# EAGLE board Safety Valve (EAGLE 9.1.3)
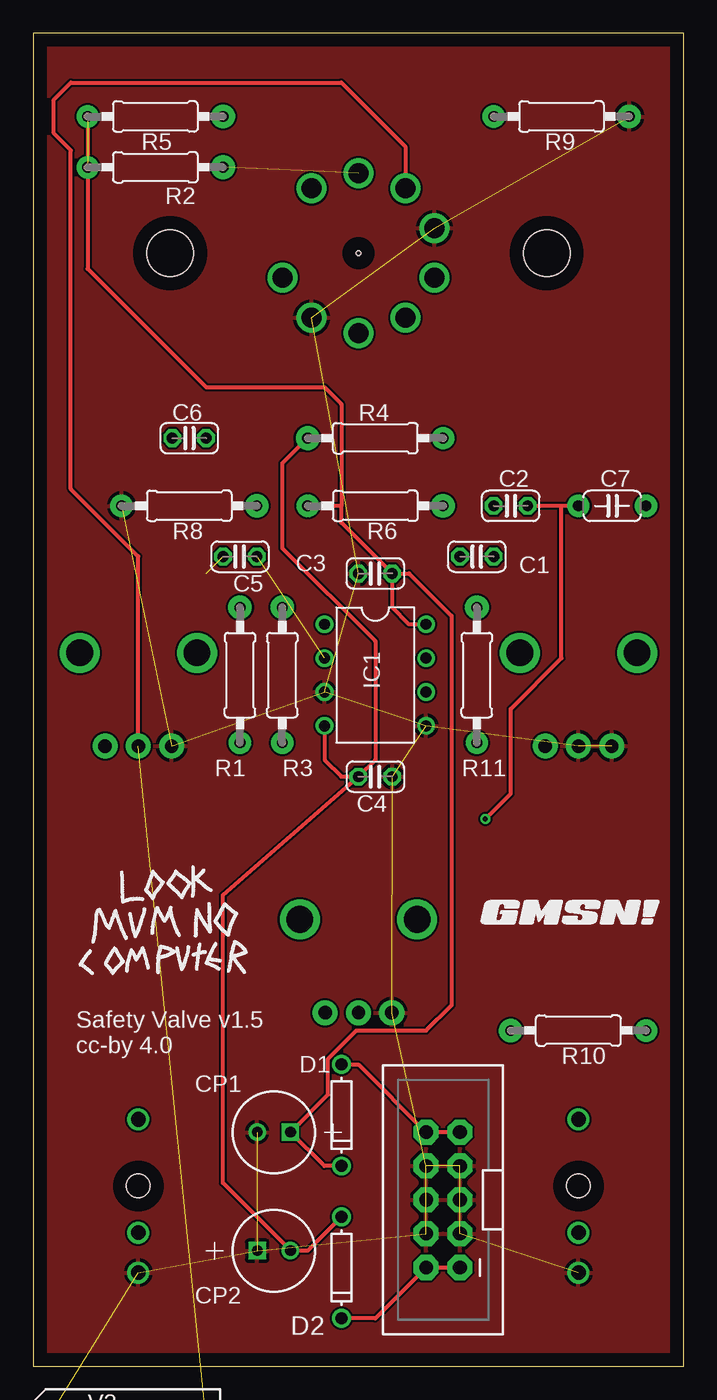
[diagram p0: board, top side]
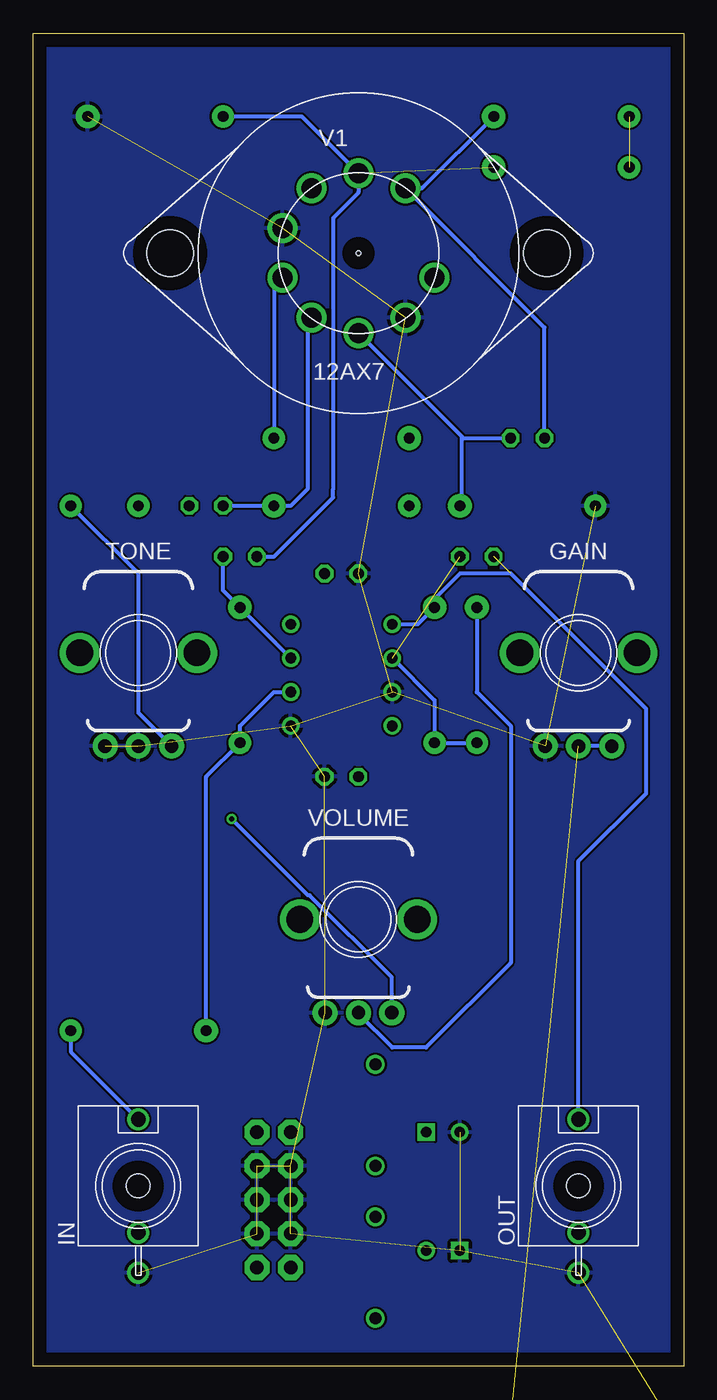
[diagram p1: board, bottom side, seen from below]

Size 48.8 x 100 mm. Coordinates in mm from the lower left corner, seen from the top.
Outline: 0,0 48.8,0 48.8,100 0,100 0,0
Copper layers (1*16): Top 0.035mm / dielectric 1.5mm / Bottom 0.035mm
Design rules "default": minimum track width 6mil, minimum drill 0.35mm, track to track 6mil, track to pad 6mil, pad to pad 6mil, via to via 6mil, smd to smd 6mil, copper to edge 40mil, drill to drill 6mil, minimum pad ring 10mil, minimum via ring 8mil, stop-mask expansion 4mil, vias tented up to drill 0mil, thermal gap 10mil

## Footprints (pad centres in the part's own frame; a part is rotated, then mirrored left to right if it is on the bottom)
C025-024X044 = drill 0.813 octagon: 1 -1.27,0; 2 1.27,0
C050-024X044 = drill 0.813 pad 1.676: 1 -2.54,0; 2 2.54,0
SANYO-OSCON_D = drill 0.8 pad 1.27 square: + 1.25,0 | drill 0.8 pad 1.27: - -1.25,0
DO-41 = drill 0.9: A -3.81,0; C 3.81,0
POTENTIOMETER_9MM = drill 1 pad 1.88: P$1 -2.5,-7; P$2 0,-7; P$3 2.5,-7 | drill 2 pad 2.68: P$4 -4.4,0; P$5 4.4,0
PJ301M-12 = drill 1.1: GND 0,-6.5; NORM 0,-3.5; TIP 0,5 | hole 1.778: 0,0
DIL08 = drill 0.813 pad 1.27: 1 -3.81,-3.81; 2 -1.27,-3.81; 3 1.27,-3.81; 4 3.81,-3.81; 5 3.81,3.81; 6 1.27,3.81; 7 -1.27,3.81; 8 -3.81,3.81
2X5-SHROUDED = drill 1.016 pad 1.88 octagon: 1 -1.27,5.08; 2 1.27,5.08; 3 -1.27,2.54; 4 1.27,2.54; 5 -1.27,0; 6 1.27,0; 7 -1.27,-2.54; 8 1.27,-2.54; 9 -1.27,-5.08; 10 1.27,-5.08
SOT23 = smd 1 x 1.4: 1 -0.95,-1.1; 2 0.95,-1.1; 3 0,1.1
0207/10 = drill 0.813 pad 1.778: 1 -5.08,0 | drill 0.813 pad 1.676: 2 5.08,0
12AX7 = drill 1.5: P$1 3.527,4.854; P$2 0,6; P$3 -3.527,4.854; P$4 -5.706,1.854; P$5 -5.706,-1.854; P$6 -3.527,-4.854; P$7 0,-6; P$8 3.527,-4.854; P$9 5.706,-1.854 | hole 3.5: 14.13,0; -14.13,0 | hole 0.35: 0,0
VTL5C-2 = drill 0.7 pad 1.3: 1 -6.35,1.27; 2 -6.35,-1.27; 3 6.35,2.54; 4 6.35,-2.54; 5 6.35,0

## Placement (x,y rotation side)
C1  47nF  [C025-024X044]  33.29,60.74 180 top
C2  47nF  [C025-024X044]  35.83,64.55 0 top
C3  100nF  [C025-024X044]  25.67,59.47 180 top
C4  100nF  [C025-024X044]  25.67,44.23 180 top
C5  100pF  [C025-024X044]  15.51,60.74 180 top
C6  47nF  [C025-024X044]  11.7,69.63 0 top
C7  1uF  [C050-024X044]  43.45,64.55 0 top
CP1  10u  [SANYO-OSCON_D]  18.05,17.56 0 top
CP2  10u  [SANYO-OSCON_D]  18.05,8.67 180 top
D1  1N4001  [DO-41]  23.13,18.83 270 top
D2  1N4001  [DO-41]  23.13,7.4 270 top
GAIN  10k  [POTENTIOMETER_9MM]  7.88,53.52 0 bottom
GAIN_CV  SOCKET_MONO_3.5MMPJ301M-12  [PJ301M-12]  -9.89,-9.11 0 top  (outside the outline)
IC1  TL072  [DIL08]  25.67,51.85 270 top
IN  SOCKET_MONO_3.5MMPJ301M-12  [PJ301M-12]  40.92,13.52 0 bottom
JP1  HEADER2X5SHD  [2X5-SHROUDED]  30.75,12.48 180 top
OUT  SOCKET_MONO_3.5MMPJ301M-12  [PJ301M-12]  7.88,13.52 0 bottom
Q1  [SOT23]  -3.54,-14.19 0 top  (outside the outline)
R1  470R  [0207/10]  15.51,51.85 270 top
R2  47k  [0207/10]  9.16,89.95 180 top
R3  1M  [0207/10]  18.68,51.85 270 top
R4  27  [0207/10]  25.67,69.63 0 top
R5  12k  [0207/10]  9.16,93.76 180 top
R6  12k  [0207/10]  25.67,64.55 180 top
R7  1k  [0207/10]  5.35,-15.46 0 top  (outside the outline)
R8  470k  [0207/10]  11.7,64.55 180 top
R9  470k  [0207/10]  39.64,93.76 180 top
R10  100k  [0207/10]  40.91,25.18 0 top
R11  100k  [0207/10]  33.29,51.85 270 top
R12  100k  [0207/10]  -9.89,-20.54 0 top  (outside the outline)
R13  100k  [0207/10]  -9.89,-25.62 0 top  (outside the outline)
TONE  5k  [POTENTIOMETER_9MM]  40.92,53.52 0 bottom
U$1  [LMNC_LOGO]  9.34,33.1 0 top
U$2  [GMSN!_LOGO]  40.57,33.97 0 top
V1  12AX7  [12AX7]  24.4,83.51 0 bottom
V2  VTL5C-2  [VTL5C-2]  6.62,-6.57 0 top  (outside the outline)
VOLUME  100k  [POTENTIOMETER_9MM]  24.4,33.52 0 bottom

## Library data of the parts
C1-C6 = GMSN; SORT: 3; SPICEPREFIX: C
C7 = GMSN; SPICEPREFIX: C
CP1 CP2 = GMSN; SORT: 6; SPICEPREFIX: C
D1 D2 = GMSN; SORT: 1; SPICEMODEL: DMOD; SPICEPREFIX: D
GAIN TONE VOLUME = GMSN; SORT: 8; SPICEPREFIX: X
GAIN_CV IN = GMSN; SORT: 8; SPICEMODEL: SocketMonoSigIn; SPICEPREFIX: X
IC1 = GMSN; SORT: 5; SPICEMODEL: TL072; SPICEPREFIX: X
JP1 = GMSN; SORT: 7; SPICEMODEL: EuroPower; SPICEPREFIX: X
OUT = GMSN; SORT: 8; SPICEMODEL: SocketMono; SPICEPREFIX: X
Q1 = GMSN; SORT: 4
R1-R13 = GMSN; SORT: 2; SPICEPREFIX: R
U$1 U$2 = GMSN
V1 = GMSN; SPICEMODEL: 12ax7; SPICEPREFIX: X
V2 = TomW

## Nets
+12V: C3.1 CP1.+ D1.C IC1.8 R2.2 R5.2 R6.2
-12V: C4.2 CP2.- D2.A IC1.4 R4.1
GND: C3.2 C4.1 CP1.- CP2.+ GAIN.P$1 GAIN_CV.GND IC1.3 IC1.5 IN.GND JP1.3 JP1.4 JP1.5 JP1.6 JP1.7 JP1.8 OUT.GND Q1.2 R8.2 R9.1 R12.1 TONE.P$1 TONE.P$2 V1.P$4 V1.P$8 V2.1 V2.4 VOLUME.P$1
N$1: GAIN.P$2 GAIN.P$3 V1.P$3 V2.3
N$2: C5.1 IC1.2 R1.2 R3.2
N$3: C2.2 C7.1 VOLUME.P$3
N$4: C5.2 IC1.1 OUT.TIP R3.1
N$5: C2.1 R6.1 V1.P$6
N$6: C6.1 R5.1 V1.P$1
N$7: C1.2 R2.1 R9.2 V1.P$2
N$8: IN.NORM
N$9: OUT.NORM
N$10: C1.1 IC1.7 R11.1
N$11: R4.2 V1.P$5
N$12: C6.2 R8.1 V1.P$7
N$13: D1.A JP1.9 JP1.10
N$14: IN.TIP R10.2
N$15: V1.P$9
N$16: D2.C JP1.1 JP1.2
N$17: C7.2 TONE.P$3
N$18: IC1.6 R10.1 R11.2
N$19: R1.1 VOLUME.P$2
N$20: GAIN_CV.TIP R13.1
N$21: Q1.1 R12.2 R13.2
N$22: R7.2 V2.2
N$24: Q1.3 R7.1

## Tracks (layer width: path | path; a pad name or v marks a point on that pad's centre or on a via)
+12V  (1 unrouted)
  Top 0.305: D1.C 21.84,15.02 CP1.+ 22.12,20.38 22.12,23.06 24.24,25.18 29.48,25.18 31.38,27.08 31.38,56.3 28.21,59.47 C3.1 | 23.13,64.55 R6.2 | R5.2 4.08,82.33 12.97,73.44 21.86,73.44 23.13,72.17 23.13,64.55 | IC1.8 28.21,55.66 26.94,56.93 C3.1 | C3.1 23.13,63.28 23.13,64.55
-12V
  Top 0.305: D2.A 20.59,8.67 CP2.- 19.3,8.69 14.24,13.75 14.24,35.34 C4.2 | R4.1 18.68,67.72 18.68,61.38 25.67,54.39 25.67,45.5 C4.2 | IC1.4 21.86,45.5 23.13,44.23 C4.2
GND  (26 unrouted)
  pour Top: 0.27,100.11 48.53,100.11 48.53,-0.22 0.27,-0.22
  pour Bottom: 0.27,100.11 48.53,100.11 48.53,-0.22 -1,-0.22 -1,100.11
N$1  (1 unrouted)
  Top 0.305: GAIN.P$2 7.88,60.75 2.81,65.82 2.81,91.22 1.54,92.49 1.54,95.03 2.81,96.3 23.13,96.3 27.93,91.5 V1.P$3
  Bottom 0.305: GAIN.P$3 GAIN.P$2
N$2  (1 unrouted)
  Bottom 0.305: IC1.2 18.68,49.94 R3.2 R1.2
N$3  (via drill 0.35)
  Top 0.305: v33.92,41.05 35.83,42.96 35.83,49.31 39.64,53.12 39.64,64.55 | 39.64,64.55 C2.2 | C7.1 39.64,64.55
  Bottom 0.305: VOLUME.P$3 21.9,29.17 28.05,35.33 28.2,35.33 v33.92,41.05
N$4  (1 unrouted)
  Bottom 0.305: IC1.1 19.95,55.66 R3.1 18.68,57.56 16.78,59.47 12.97,59.47 2.81,49.31 2.81,42.96 7.88,37.89 OUT.TIP
N$5
  Bottom 0.305: V1.P$6 28.21,78.37 28.21,65.82 29.48,64.55 R6.1 C2.1
N$6
  Bottom 0.305: R5.1 19.64,88.36 V1.P$1 10.43,77.92 C6.1
N$7  (1 unrouted)
  Bottom 0.305: V1.P$2 24.62,89.73 | 24.62,89.73 28.65,93.76 R9.2 | V1.P$2 24.62,89.73 | V1.P$2 24.4,88.05 26.3,86.14 26.3,65.82 26.3,65.19 30.75,60.74 C1.2
N$10
  Bottom 0.305: IC1.7 R11.1 34.56,58.2 C1.1
N$11
  Bottom 0.305: V1.P$5 30.75,81.01 R4.2
N$12
  Bottom 0.305: V1.P$7 16.65,69.76 | 16.65,69.76 16.52,69.63 C6.2 | R8.1 16.65,64.68 16.65,69.76
N$13
  Top 0.305: JP1.9 JP1.10 24.4,22.64 D1.A
N$14
  Bottom 0.305: R10.2 45.99,23.59 IN.TIP
N$16
  Top 0.305: JP1.1 JP1.2 25.67,3.59 D2.C
N$17
  Bottom 0.305: TONE.P$3 40.91,49.01 40.91,59.47 C7.2
N$18
  Bottom 0.305: R10.1 35.83,44.23 R11.2 33.29,48.04 30.75,50.58 IC1.6
N$19
  Bottom 0.305: R1.1 15.51,50.58 12.97,48.04 12.97,30.26 19.32,23.91 21.86,23.91 24.4,26.45 VOLUME.P$2
N$20  (1 unrouted)
N$21  (2 unrouted)
N$22  (1 unrouted)
N$24  (1 unrouted)

## Text on the board
tPlace: Safety Valve v1.5 / cc-by 4.0